# EAGLE board 3rd BOard (EAGLE 9.7.0)
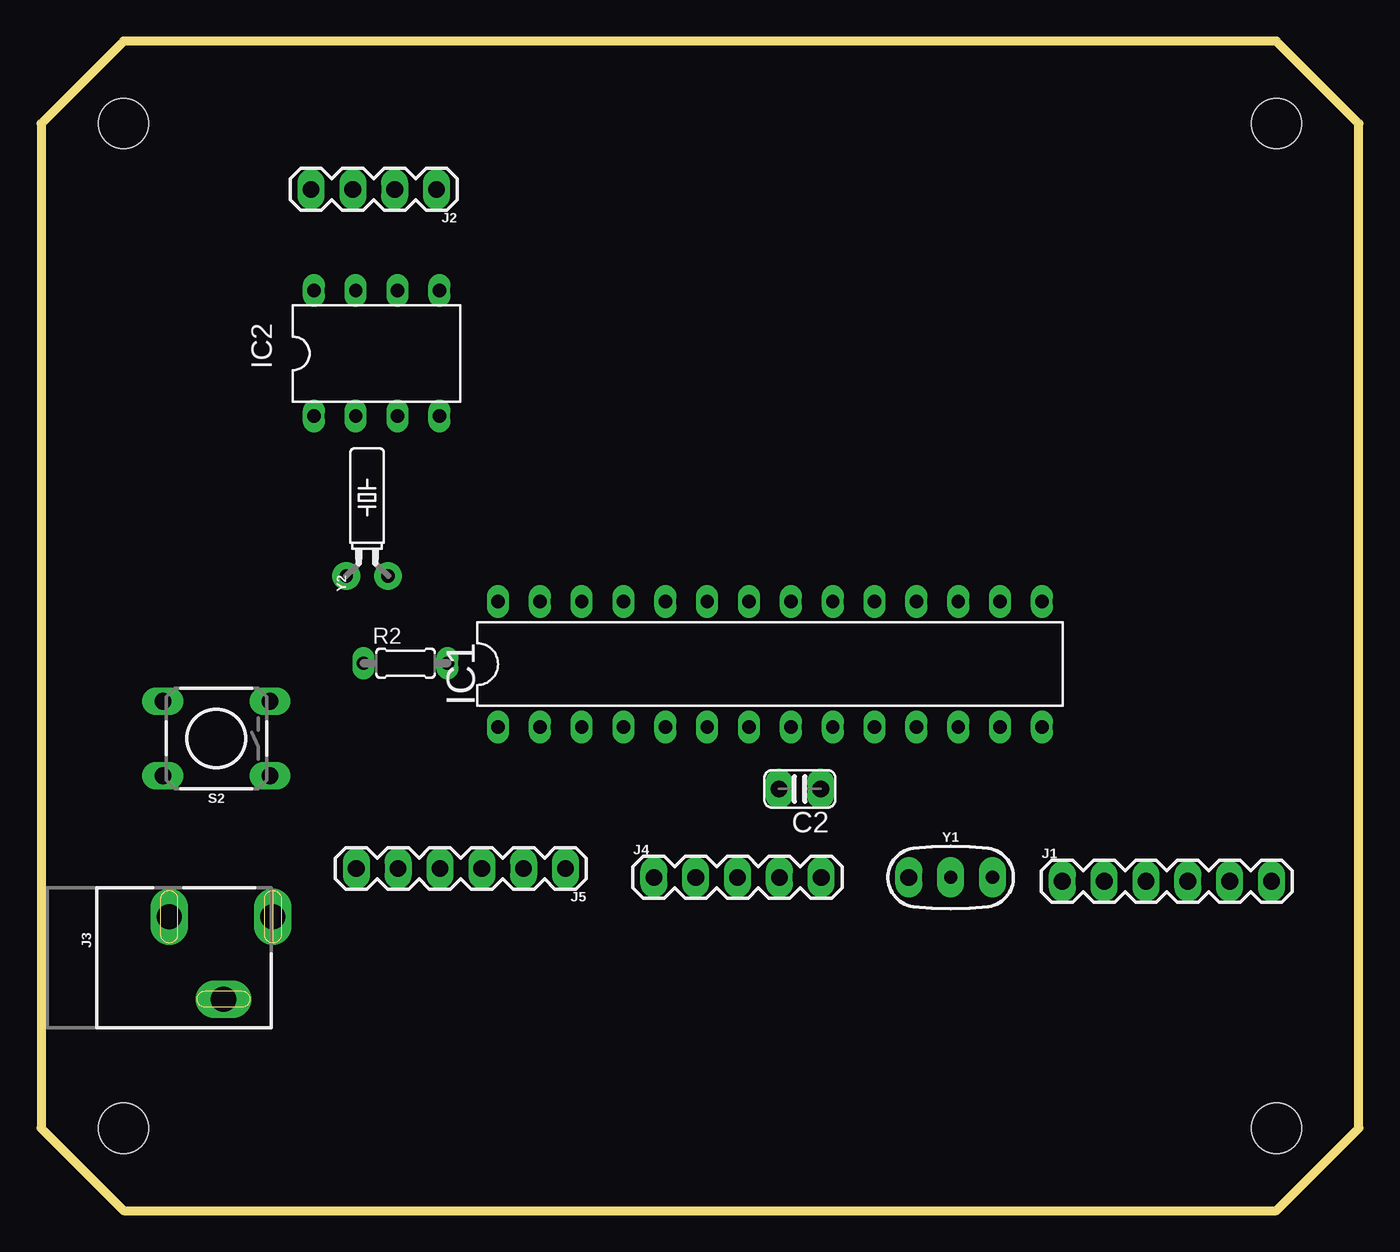
[diagram p0: board, top side]
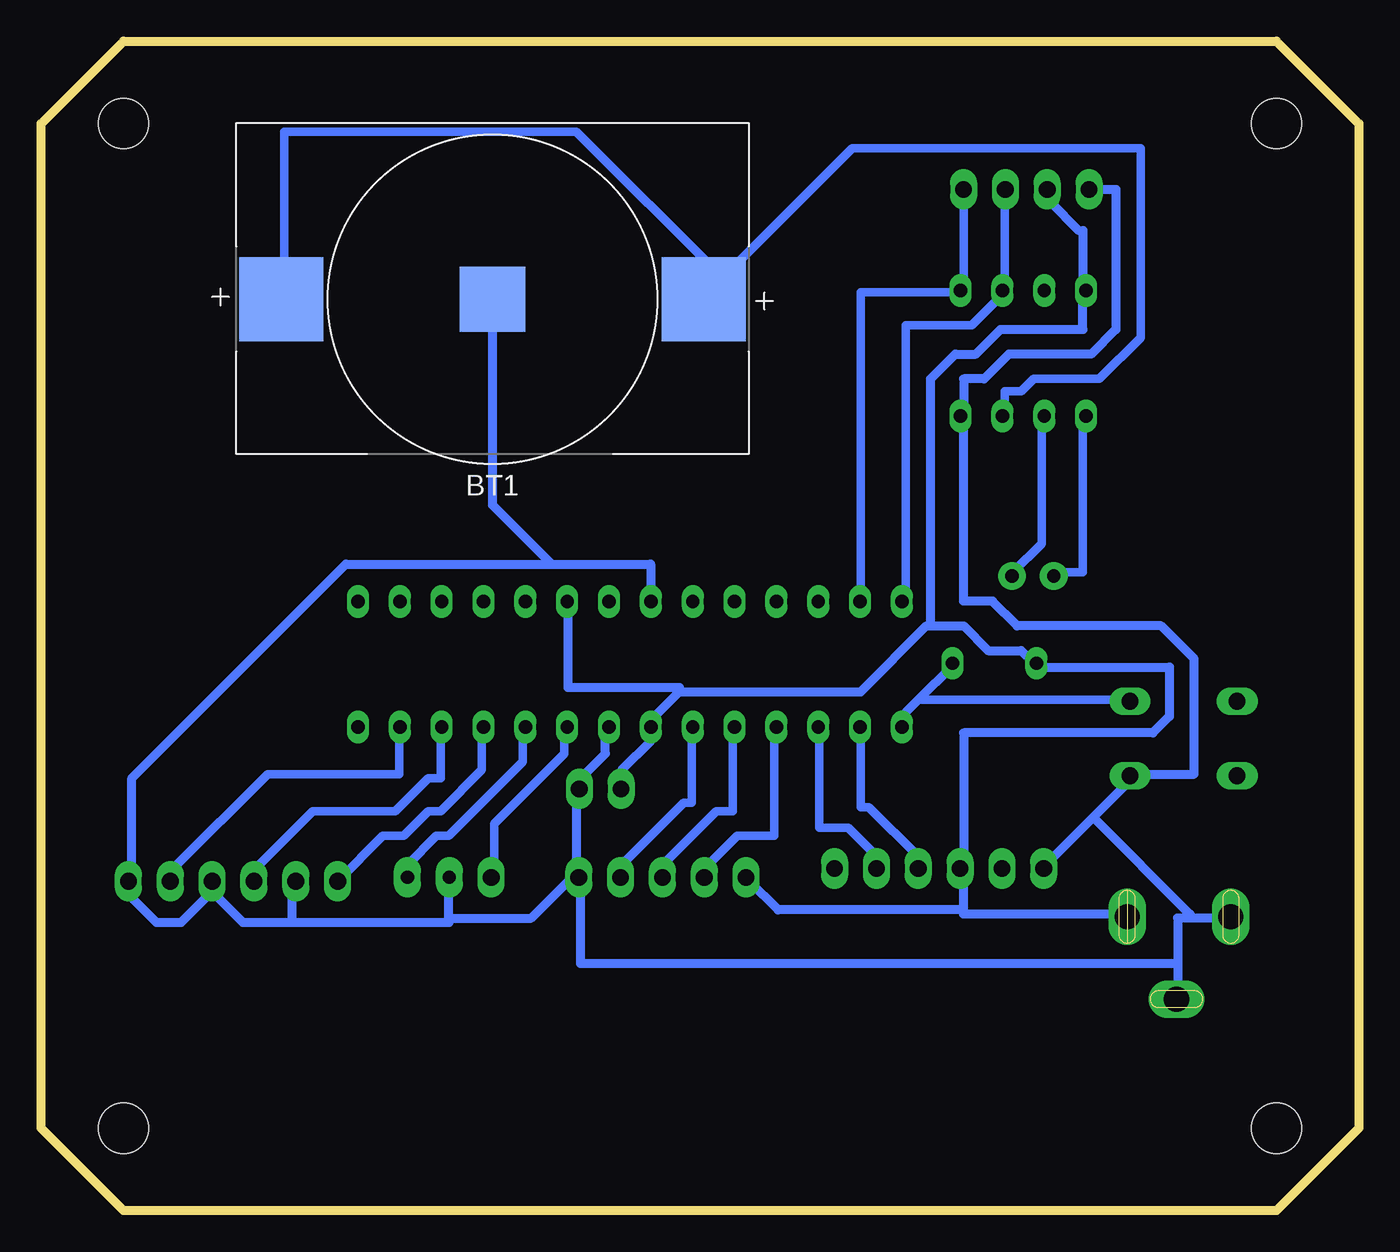
[diagram p1: board, bottom side, seen from below]

Size 80 x 71 mm. Coordinates in mm from the lower left corner, seen from the top.
Outline: 0,66 0,5 5,0 75,0 80,5 80,66 75,71 5,71 0,66
Copper layers (1*16): Top 0.035mm / dielectric 1.5mm / Bottom 0.035mm
Design rules "OthermillDRC_1_32_v2": minimum track width 8mil, minimum drill 0.8mm, track to track 0.794003125mm, track to pad 0.794003125mm, pad to pad 0.794003125mm, via to via 0.794003125mm, smd to smd 0mil, copper to edge 0mil, drill to drill 1mil, minimum pad ring 10mil, minimum via ring 10mil, stop-mask expansion 1mil, vias tented up to drill 30mil, thermal gap 10mil
Net classes: 0 signal: width 0.508 mm, drill 0.508 mm, clearance 0.508 mm; 1 signal 2: width 0.457 mm, drill 0.457 mm, clearance 0.457 mm; 2 power: width 0.559 mm, drill 0.559 mm, clearance 0.559 mm
Holes 3.05 mm at 5,5 5,66 75,66 75,5
bRestrict: area 42.2,45.2 to 61.8,64.8

## Footprints (pad centres in the part's own frame; a part is rotated, then mirrored left to right if it is on the bottom)
BAT_3002 = smd 3.96 x 3.96: N 0,0.65 | smd 5.08 x 5.08: P 12.825,0.65; P1 -12.825,0.65
C025-024X044 = drill 1.016 pad 1.651 long: 1 -1.27,0; 2 1.27,0
DIL28-3 = drill 0.813 long: 1 -16.51,-3.81; 2 -13.97,-3.81; 3 -11.43,-3.81; 4 -8.89,-3.81; 5 -6.35,-3.81; 6 -3.81,-3.81; 7 -1.27,-3.81; 8 1.27,-3.81; 9 3.81,-3.81; 10 6.35,-3.81; 11 8.89,-3.81; 12 11.43,-3.81; 13 13.97,-3.81; 14 16.51,-3.81; 15 16.51,3.81; 16 13.97,3.81; 17 11.43,3.81; 18 8.89,3.81; 19 6.35,3.81; 20 3.81,3.81; 21 1.27,3.81; 22 -1.27,3.81; 23 -3.81,3.81; 24 -6.35,3.81; 25 -8.89,3.81; 26 -11.43,3.81; 27 -13.97,3.81; 28 -16.51,3.81
DIL08 = drill 0.813 long: 1 -3.81,-3.81; 2 -1.27,-3.81; 3 1.27,-3.81; 4 3.81,-3.81; 5 3.81,3.81; 6 1.27,3.81; 7 -1.27,3.81; 8 -3.81,3.81
1X06 = drill 1.016 pad 1.651 long: 1 0,0; 2 2.54,0; 3 5.08,0; 4 7.62,0; 5 10.16,0; 6 12.7,0
1X04 = drill 1.016 pad 1.651 long: 1 0,0; 2 2.54,0; 3 5.08,0; 4 7.62,0
POWER_JACK_SLOT = drill 1.524 pad 2.032 long: GND@1 2.58,7.5; GND@2 7.58,10.8; PWR 2.58,13.8
1X05 = drill 1.016 pad 1.651 long: 1 0,0; 2 2.54,0; 3 5.08,0; 4 7.62,0; 5 10.16,0
0204/5 = drill 0.813 long: 1 -2.54,0; 2 2.54,0
TACTILE_SWITCH_PTH_6.0MM = drill 1.016 pad 1.676 long: 1 -3.251,2.261; 2 3.251,2.261; 3 -3.251,-2.261; 4 3.251,-2.261
RESONATOR-PTH-7.6X3.8 = drill 1.016 pad 1.651 long: 1 -2.54,0 | drill 0.8 pad 1.651 long: 2 0,0; 3 2.54,0
CRYSTAL-PTH-2X6-CYL = drill 0.813 pad 1.676: 1 -1.27,0; 2 1.27,0

## Placement (x,y rotation side)
BT1  CR2032  [BAT_3002]  52.6,55.98 180 bottom
C2  [C025-024X044]  46.06,25.6 180 top
IC1  ATMEGA168-20P  [DIL28-3]  44.25,33.18 0 top
IC2  DS1307  [DIL08]  20.37,52.04 0 top
J1  [1X06]  62,20 0 top
J2  [1X04]  24,62 180 top
J3  POWER_JACKSLT  [POWER_JACK_SLOT]  0.27,20.42 270 top
J4  [1X05]  37.2,20.23 0 top
J5  [1X06]  31.83,20.77 180 top
R2  [0204/5]  22.12,33.23 0 top
S2  MOMENTARY-SWITCH-SPST-PTH-6.0MM  [TACTILE_SWITCH_PTH_6.0MM]  10.64,28.66 180 top
Y1  [RESONATOR-PTH-7.6X3.8]  55.22,20.23 0 top
Y2  [CRYSTAL-PTH-2X6-CYL]  19.79,38.53 0 top

## Library data of the parts
BT1 = Battery_Holder; CATEGORY: Battery-Holder; CELL_DIAMETER: 20mm; DESCRIPTION: Battery Retainer Coin, 20.0mm 1 Cell SMD (SMT) Tab; MANUFACTURER: Keystone Electronics; MPN: 3002; PART_STATUS: ACTIVE; ROHS_COMPLIANT: COMPLIANT; SERIES: -; SUB_CATEGORY: Holder; TYPE: Coin Cell
C2 = CapacitorLongPads
IC1 IC2 = adafruit
J1 J5 = 6PinPadFIx; PROD_ID: CONN-08437
J2 = 4 LONG PAD FIXED; PROD_ID: CONN-09696
J3 = fixedPOWERJACKPADS; PROD_ID: PRT-00119
J4 = 5HeaderLarge
R2 = resistor
S2 = MomentarySwitchLONGPADS; PROD_ID: SWCH-08441; SF_SKU: COM-00097
Y1 = 1resonatorPadsLong
Y2 = SparkFun-Clocks

## Nets
5V [power]: C2.2 IC1.7 IC1.20 IC2.8 J2.3 J3.PWR J4.1 J5.4 R2.1
GND [power]: BT1.N C2.1 IC1.8 IC1.22 IC2.4 J1.2 J1.4 J1.6 J2.4 J3.GND@1 J3.GND@2 J4.5 J5.6 S2.1 Y1.2
N$1: IC2.2 Y2.2
N$2: IC2.1 Y2.1
N$3: IC1.9 Y1.1
N$4: IC1.10 Y1.3
N$6: BT1.P BT1.P1 IC2.3
N$8: IC1.4 J4.2
N$9: IC1.11 J1.1
N$10: IC1.5 J4.3
N$11: IC1.1 R2.2 S2.3
N$12: IC1.6 J4.4
N$13: IC1.12 J1.3
N$14: IC1.13 J1.5
RXD: IC1.2 J5.3
SCL: IC1.28 IC2.6 J2.2
SDA: IC1.27 IC2.5 J2.1
TXD: IC1.3 J5.2

## Tracks (layer width: path | path; a pad name or v marks a point on that pad's centre or on a via)
5V
  Bottom 0.559: 24,18.25 24,18 14.25,18 J3.PWR | 24,18.25 24,20.75 J5.4 24,21 24,29 12.5,29 11.5,30 11.5,33 19.5,33 R2.1 19.75,33.25 20.5,34 22.5,34 24,35.5 26,35.5 | 24,18.25 35.25,18.25 37,20 J4.1 | J2.3 18.75,62 18.75,61.25 17,59.5 16.75,59.5 16.75,56 IC2.8 16.75,55.75 16.75,53.5 21.75,53.5 23.25,52 24.5,52 26,50.5 26,35.5 | 26,35.5 26.25,35.5 30.25,31.5 41.25,31.5 | 41.25,31.5 42.75,30 42.75,29.5 IC1.7 43,29.25 43,28.5 44.75,26.75 44.75,25.75 C2.2 | IC1.20 48,36.75 48,31.75 41.25,31.75 41.25,31.5
GND
  Bottom 0.559: IC1.8 45.75,29.25 45.75,27.75 47.25,26.25 47.25,25.75 C2.1 47.5,25.5 47.5,20.25 J4.5 | 64.75,17.5 64.75,20 J1.2 | 64.75,17.5 67.75,17.5 69.5,19.25 69.5,20 J1.4 69.75,19.25 71.5,17.5 73,17.5 74.5,19 74.5,19.75 J1.6 74.5,20 74.5,26.25 61.5,39.25 49,39.25 | 55.25,17.75 55.25,17.5 64.75,17.5 | 55.25,17.75 55.25,20 Y1.2 | 55.25,17.75 50.25,17.75 47.75,20.25 J4.5 | 49,39.25 43,39.25 43,37 IC1.22 | J2.4 14.75,62 14.75,53.5 16.25,52 21.25,52 22.75,50.5 24,50.5 24,48.25 IC2.4 24,48 24,37 22.25,37 20.75,35.5 12,35.5 10,33.5 10,26.5 13.75,26.5 S2.1 13.75,26.25 16.12,23.88 | 16.12,23.88 19,21 J5.6 | 11,15 11,17.75 10.25,17.75 | 11,15 11,13 J3.GND@2 | 10.25,17.75 8,17.75 J3.GND@1 | 16.12,23.88 10.25,18 10.25,17.75 | 11,15 47.25,15 47.25,20 J4.5 | BT1.N 52.6,42.85 49,39.25
N$1
  Bottom 0.508: IC2.2 19.25,48 19.25,40.5 21,38.75 Y2.2
N$2
  Bottom 0.508: IC2.1 16.75,48 16.75,38.75 18.5,38.75 Y2.1
N$3
  Bottom 0.508: IC1.9 48.25,29.25 48.25,27.75 52.5,23.5 52.5,20.25 Y1.1
N$4
  Bottom 0.508: IC1.10 50.75,29.25 50.75,27.25 55.25,22.75 56,22.75 57.75,21 57.75,20.25 Y1.3
N$6
  Bottom 0.508: IC2.3 21.5,48.25 21.5,49.75 20.5,49.75 19.75,50.5 15.75,50.5 13.25,53 13.25,64.5 30.75,64.5 39.75,55.5 BT1.P1 38.75,56.75 47.5,65.5 65.25,65.5 65.25,55.5 BT1.P
N$8
  Bottom 0.508: IC1.4 35.5,29.25 35.5,22.75 37.75,22.75 39.5,21 39.5,20.25 J4.2
N$9
  Bottom 0.508: J1.1 59.25,22.75 58,22.75 56.5,24.25 55.75,24.25 53.25,26.75 53.25,29.25 IC1.11
N$10
  Bottom 0.508: IC1.5 38,29.25 38,24.25 39,24.25 42.25,21 42.25,20.25 J4.3
N$11
  Bottom 0.508: 26.62,31.12 27.5,30.25 27.5,29.5 IC1.1 | 26.62,31.12 24.75,33 R2.2 | S2.3 14,31 26.5,31 26.62,31.12
N$12
  Bottom 0.508: IC1.6 40.5,29.25 40.5,24.75 41,24.75 44.75,21 44.75,20.25 J4.4
N$13
  Bottom 0.508: IC1.12 55.75,29.25 55.75,26.25 56.5,26.25 58.5,24.25 63.5,24.25 67,20.75 67,20 J1.3
N$14
  Bottom 0.508: IC1.13 58.25,29.25 58.25,26.5 66.25,26.5 72,20.75 72,20 J1.5
RXD
  Bottom 0.508: J5.3 26.75,21.5 29.75,24.5 30.25,24.5 30.25,29.25 IC1.2
SCL
  Bottom 0.508: J2.2 21.5,62 21.5,56 IC2.6 21.5,55.75 23.5,53.75 27.5,53.75 27.5,37 IC1.28
SDA
  Bottom 0.508: IC1.27 30.25,37 30.25,55.75 24.25,55.75 IC2.5 24,56 J2.1
TXD
  Bottom 0.508: IC1.3 32.75,29.25 32.75,23.25 31,23.25 29.5,21.75 29.5,21 J5.2